# Altium PCB WEB_SERVER.PcbDoc (part 1 of 2)
Units mm, origin at the board's own origin, x right, y up, seen from the top; angles counter-clockwise.
Board outline 87.86 x 117.54 mm, 2 copper layers (Top Layer, Bottom Layer); 161 components, 198 nets, 620 pads, 277 vias.
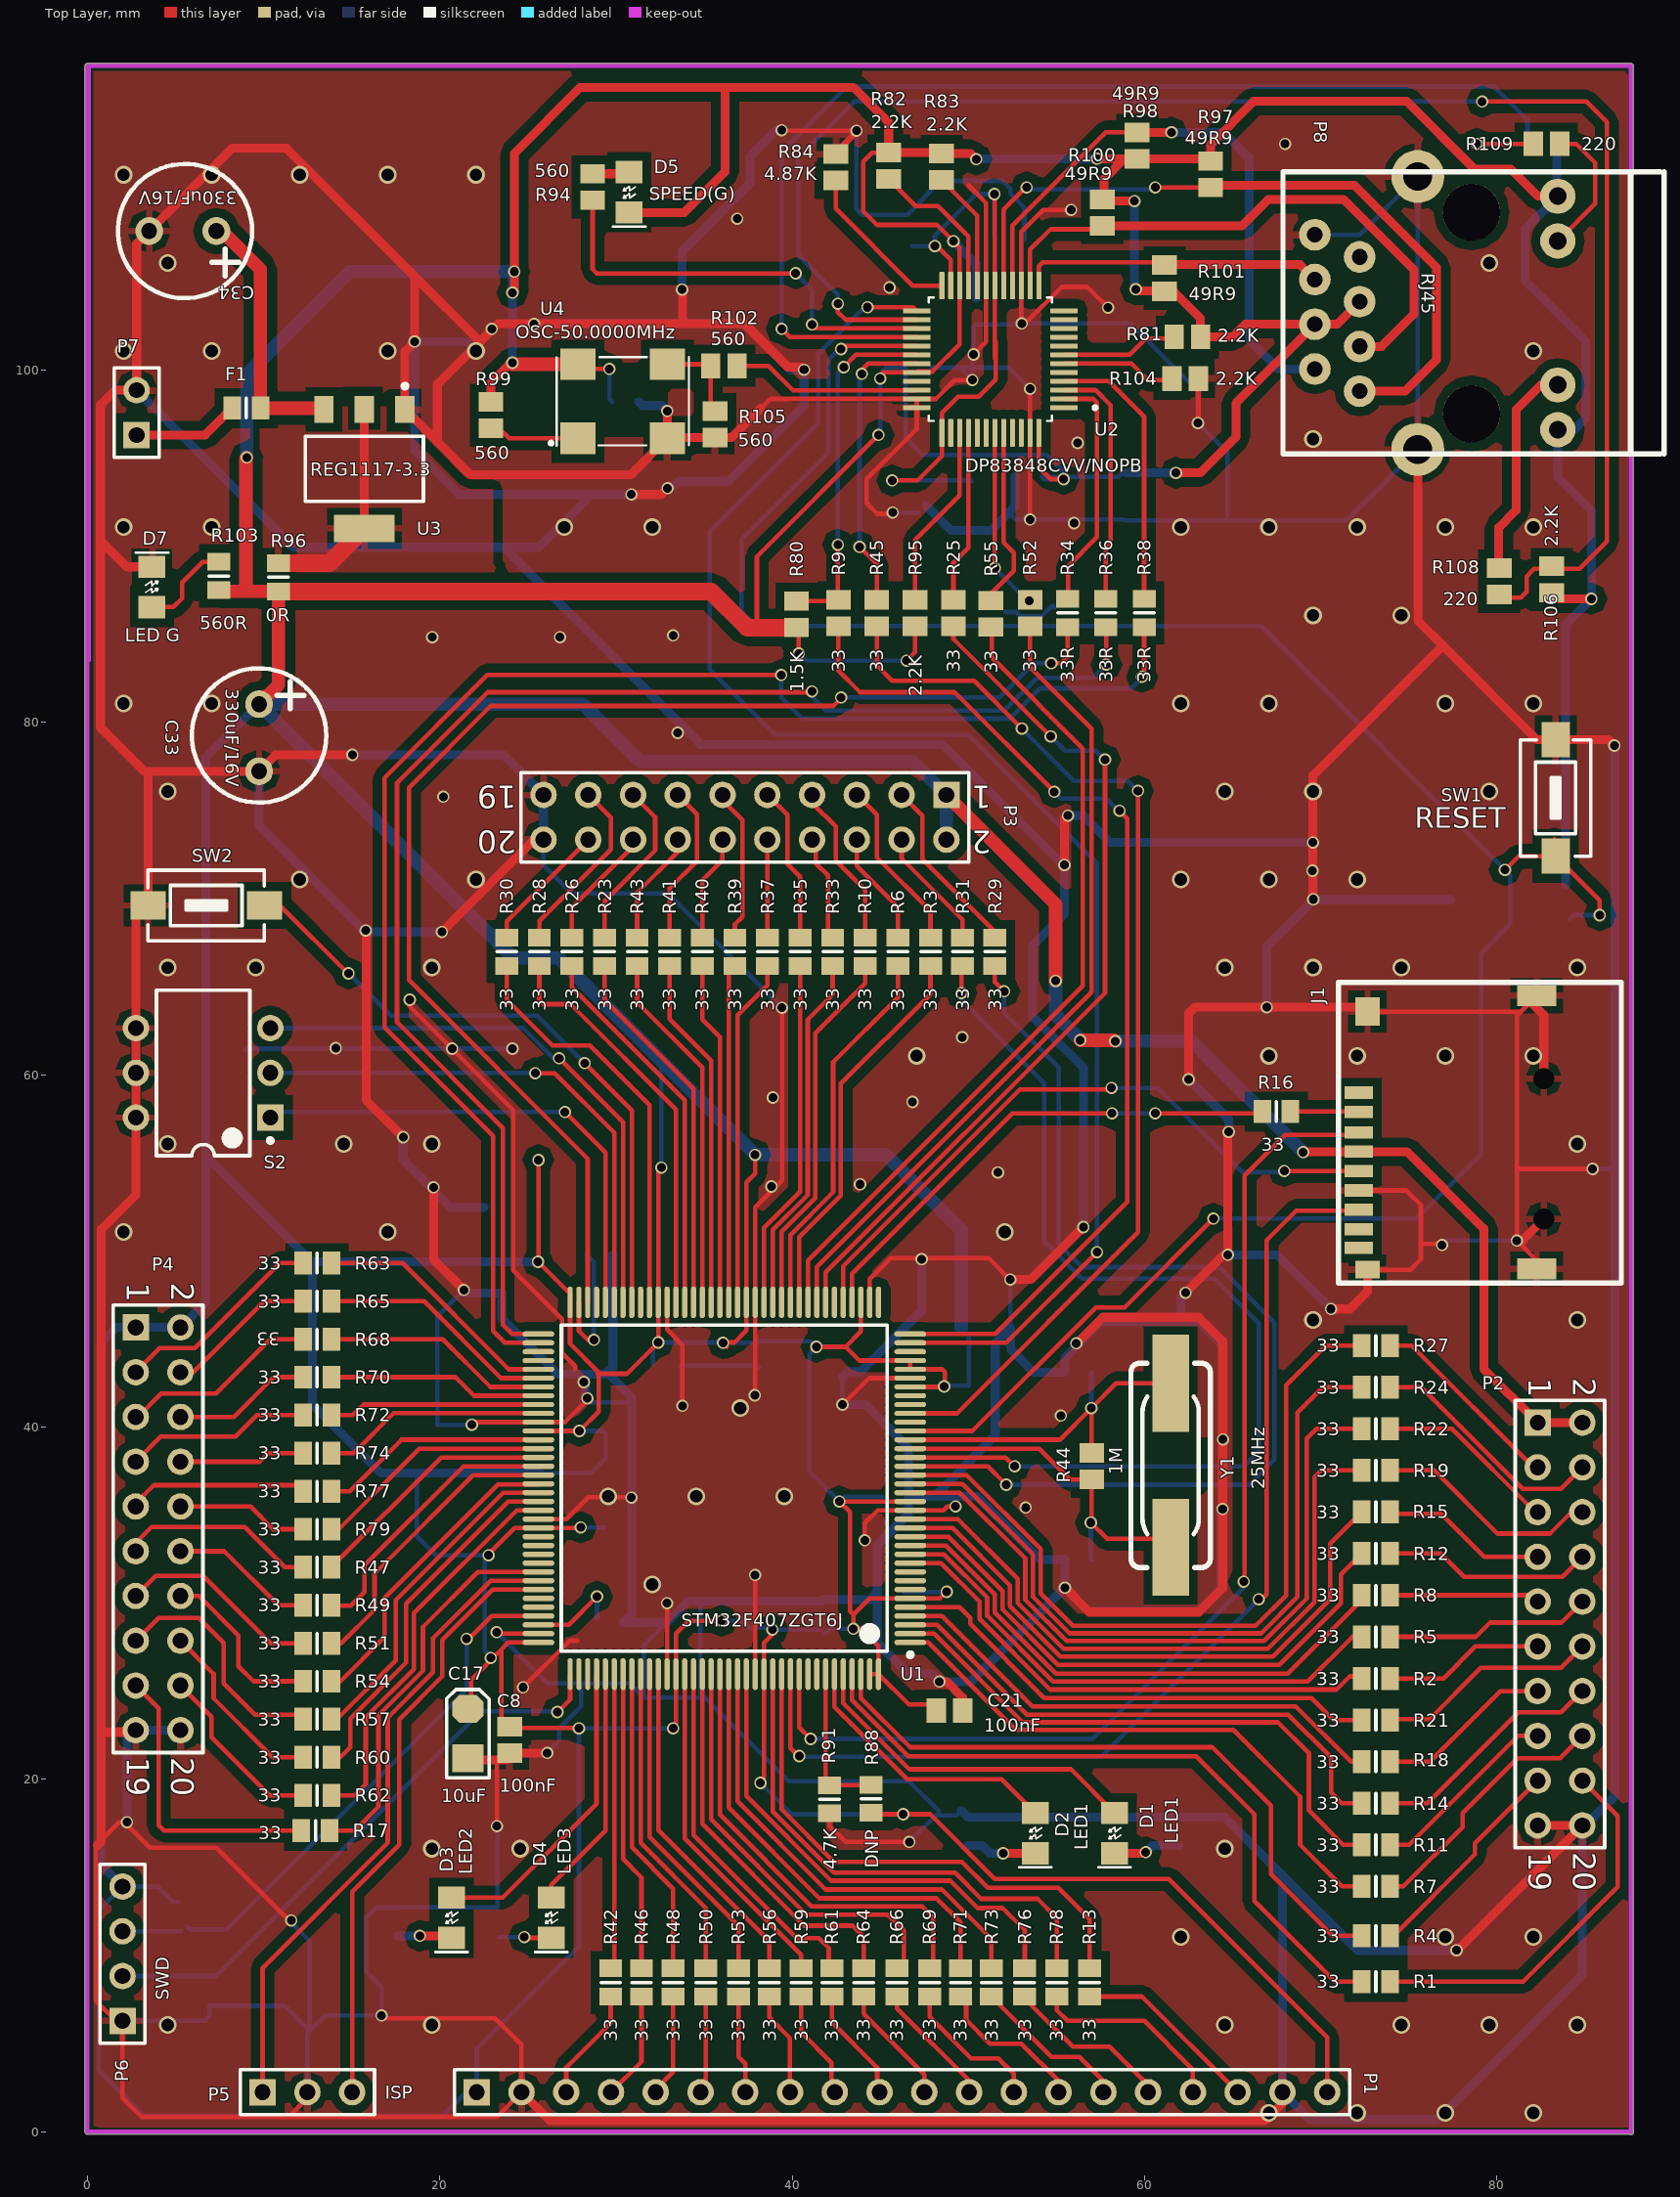
[diagram p0: Top Layer view]
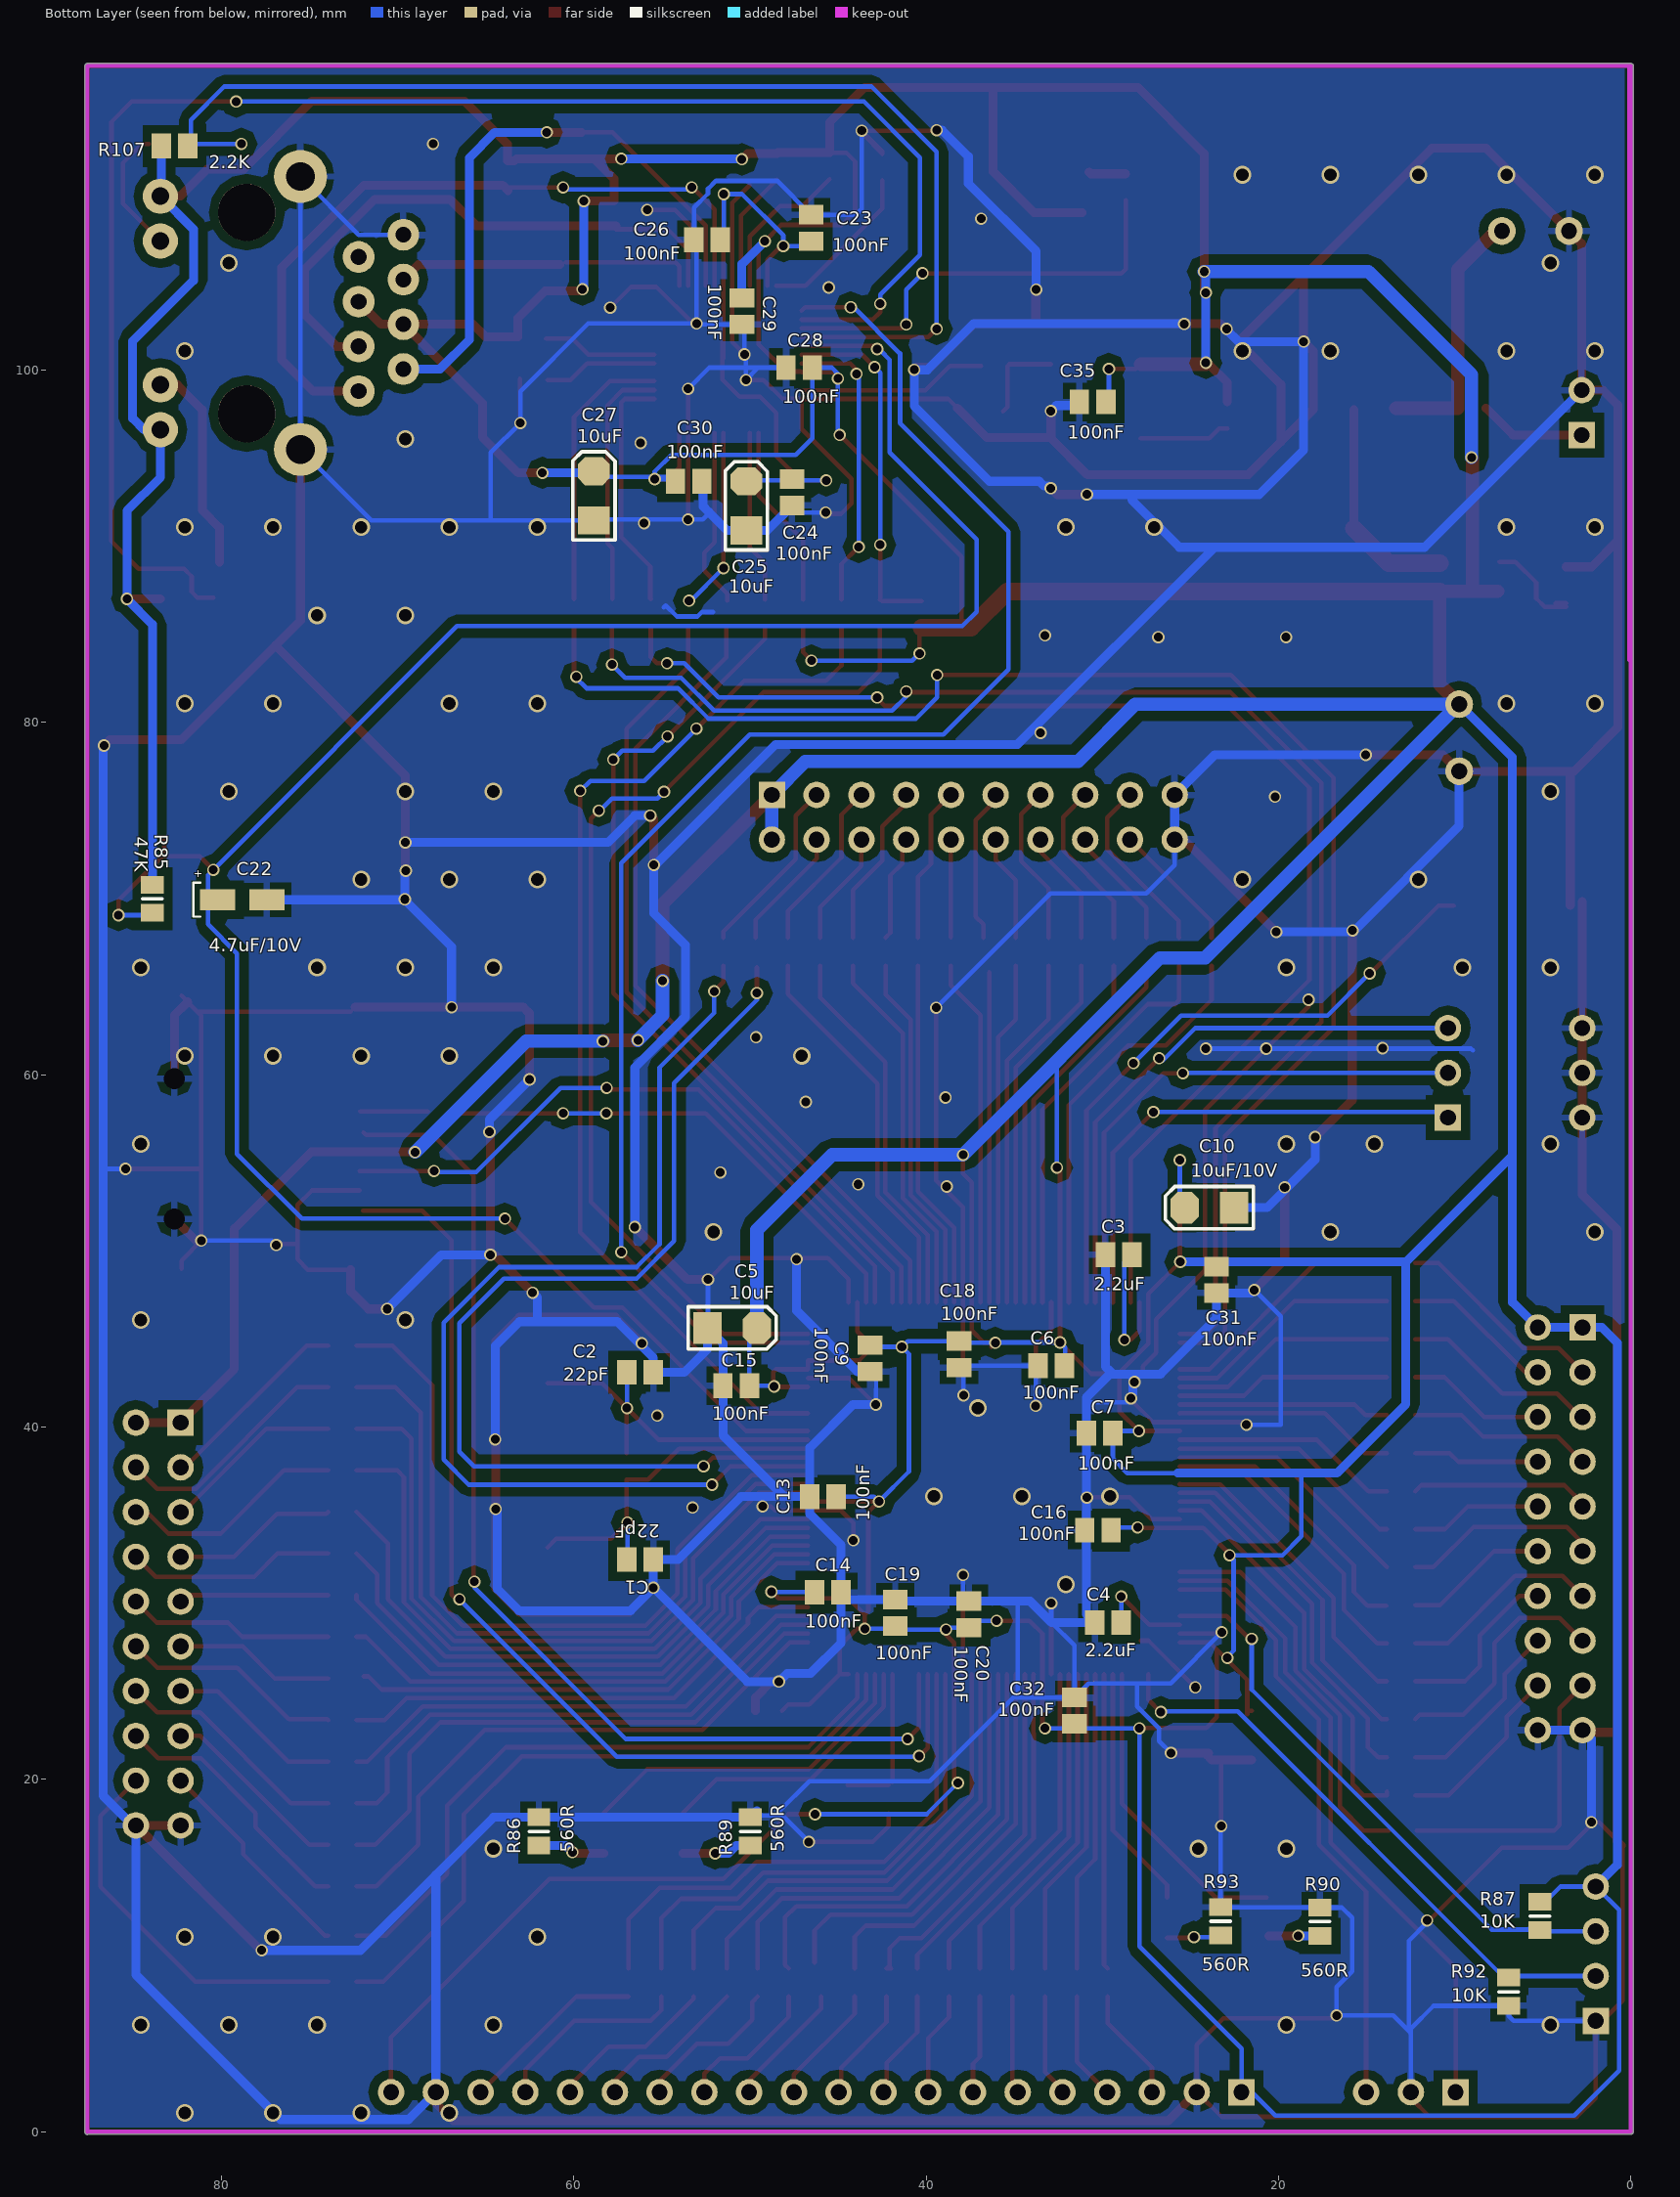
[diagram p1: Bottom Layer view, seen from below]

## Layer stack, top to bottom
Top Solder: solder mask 0.0102, Solder Resist, Dk 3.5
Top Layer: signal copper 0.0356
Dielectric1: dielectric 0.32, FR-4, Dk 4.8
Bottom Layer: signal copper 0.0356
Bottom Solder: solder mask 0.0102, Solder Resist, Dk 3.5

## Board outline
-0.128,0 ccw(c0,0) 0.016,-0.127 87.524,-0.127 ccw(c87.6,-0.025) 87.727,-0.025 87.727,117.257 ccw(c87.6,117.257) 87.6,117.384 87.541,117.384 ccw(c87.525,117.257) 87.525,117.385 0,117.385 ccw(c0,117.257) -0.128,117.257

## Design rules (kind name [scope] priority, off if disabled: settings)
Clearance Clearance_3 [InNetClass('RF HV Signal')] p1: gap=1.016 ignorepadtopadclearanceinfootprint=FALSE except(0: Arc-Hole Track-Hole SMDPad-Hole THPad-Hole Via-Hole Fill-Hole Poly-Hole Region-Hole Text-Hole)
Clearance Clearance_2 [InNetClass('220V')] p2: gap=1.016 ignorepadtopadclearanceinfootprint=FALSE except(0: Arc-Hole Track-Hole SMDPad-Hole THPad-Hole Via-Hole Fill-Hole Poly-Hole Region-Hole Text-Hole)
Clearance Clearance_1 [InPolygon vs OnLayer('Keep-Out Layer')] p3: gap=0.025 ignorepadtopadclearanceinfootprint=FALSE except(0: Arc-Hole Track-Hole SMDPad-Hole THPad-Hole Via-Hole Fill-Hole Poly-Hole Region-Hole Text-Hole)
Clearance Clearance_poly [InPolygon] p4: gap=0.508 ignorepadtopadclearanceinfootprint=FALSE except(0: Arc-Hole Track-Hole SMDPad-Hole THPad-Hole Via-Hole Fill-Hole Poly-Hole Region-Hole Text-Hole)
Clearance [All] p5: gap=0.178 ignorepadtopadclearanceinfootprint=FALSE except(0: Arc-Hole Track-Hole SMDPad-Hole THPad-Hole Via-Hole Fill-Hole Poly-Hole Region-Hole Text-Hole)
ComponentClearance [All] p1: gap=0 collisioncheckmode=3 verticalgap=0 showdistances=FALSE
DiffPairsRouting [All] p1: maxlimit=0.203 minlimit=0.203 mostfreqgap=0.203 toplayer_minwidth=0.203 toplayer_maxwidth=2.54 toplayer_prefwidth=0.762 bottomlayer_minwidth=0.203 bottomlayer_maxwidth=2.54 bottomlayer_prefwidth=0.762 maxuncoupledlength=12.7
HoleSize [All] p1: absolutevalues=TRUE maxlimit=7.62 minlimit=0.025 maxpercent=80.000 minpercent=20.000
PolygonConnect PolygonConnect_VIA [ISPoly vs IsVia] p1: thpad.connectstyle=Relief thpad.reliefconductorwidth=0.254 thpad.reliefentries=4 thpad.polygonreliefangle="90 Angle" thpad.airgapwidth=0.254 smdpad.connectstyle=Relief smdpad.reliefconductorwidth=0.254 smdpad.reliefentries=4 smdpad.polygonreliefangle="90 Angle" smdpad.airgapwidth=0.254 via.connectstyle=Direct via.reliefconductorwidth=0.254 via.reliefentries=4 via.polygonreliefangle="90 Angle" via.airgapwidth=0.254
PolygonConnect [IsPoly] p2: thpad.connectstyle=Relief thpad.reliefconductorwidth=0.381 thpad.reliefentries=4 thpad.polygonreliefangle="90 Angle" thpad.airgapwidth=0.381 smdpad.connectstyle=Relief smdpad.reliefconductorwidth=0.381 smdpad.reliefentries=4 smdpad.polygonreliefangle="90 Angle" smdpad.airgapwidth=0.381 via.connectstyle=Direct via.reliefconductorwidth=0.381 via.reliefentries=4 via.polygonreliefangle="90 Angle" via.airgapwidth=0.381
RoutingVias [All] p1: holewidth=0.5 width=0.7 viastyle="Through Hole" minholewidth=0.305 minwidth=0.508 maxholewidth=1 maxwidth=1
SolderMaskExpansion [All] p1: expansion=0.102
Width [All] p1: maxlimit=4 minlimit=0.256 preferedwidth=0.5 minimp=50.000000 maximp=50.000000 favimp=50.000000
27 further rules are at their usual default settings.

## Components (designator, comment, footprint, x,y, rotation, side; value= is the part's Value field where it differs from the comment)
C1 "22pF" C0805 56.225,32.475 r180 bottom
C2 "22pF" C0805 56.225,43.1 r0 bottom
C3 "2.2uF" C0805 29.075,49.775 r180 bottom
C4 "2.2uF" C0805 29.675,28.9 r180 bottom
C5 "10uF" CAP_Tantal_1206 51,45.625 r270 bottom value=100pF
C6 "100nF" C0805 32.9,43.475 r0 bottom
C7 "100nF" C0805 30.15,39.65 r0 bottom
C8 "100nF" C0805 23.975,22.25 r270 top
C9 "100nF" C0805 43.175,43.9 r270 bottom
C10 "10uF/10V" CAP_Tantal_1206 23.925,52.45 r90 bottom
C13 "100nF" C0805 45.85,36.05 r0 bottom
C14 "100nF" C0805 45.575,30.625 r180 bottom
C15 "100nF" C0805 50.775,42.35 r0 bottom
C16 "100nF" C0805 30.25,34.15 r0 bottom
C17 "10uF" CAP_Tantal_1206 21.6,22.6 r0 top value=100pF
C18 "100nF" C0805 38.125,44.125 r270 bottom
C19 "100nF" C0805 41.75,29.45 r90 bottom
C20 "100nF" C0805 37.569,29.365 r90 bottom
C21 "100nF" C0805 48.925,23.9 r0 top
C22 "4.7uF/10V" "Tantalium CAPP Size A 1206 (3216X18L)" 80.2,69.925 r180 bottom
C23 "100nF" c0805 46.525,108.05 r90 bottom value=100pF
C24 "100nF" C0805 47.6,93.05 r270 bottom value=100pF
C25 "10uF" CAP_Tantal_1206 50.2,92.275 r180 bottom value=100pF
C26 "100nF" c0805 52.425,107.375 r0 bottom value=100pF
C27 "10uF" CAP_Tantal_1206 58.85,92.85 r180 bottom value=100pF
C28 "100nF" C0805 47.2,100.125 r0 bottom value=100pF
C29 "100nF" c0805 50.45,103.325 r270 bottom value=100pF
C30 "100nF" C0805 53.475,93.675 r180 bottom value=100pF
C31 "100nF" c0805 23.525,48.35 r270 bottom value=100pF
C32 "100nF" c0805 31.575,23.9 r90 bottom value=100pF
C33 "330uF/16V" RB.15/.3 9.75,81.025 r90 top
C34 "330uF/16V" RB.15/.3 7.325,107.875 r0 top
C35 "100nF" c0805 30.55,98.175 r0 bottom value=100pF
D1 "LED1" LED_805 58.3,16.95 r180 top
D2 "LED1" LED_805 53.8,16.95 r180 top
D3 "LED2" LED_805 20.675,12.15 r180 top
D4 "LED3" LED_805 26.325,12.15 r180 top
D5 "SPEED(G)" LED0805 30.75,110.075 r0 top
D7 "LED G" LED_805 3.675,87.675 r0 top
F1 "1A Fuse" 6-0805_L 9.025,97.825 r0 top
J1 "7MSDP-B0-1012" "MicroSD Slot" 79.55,56.725 r90 top
P1 "Header 20" HDR1X20 22.1,2.25 r0 top
P2 "Header 10X2" HDR2X10 82.3,40.25 r270 top
P3 "Header 10X2" HDR2X10 48.75,75.875 r180 top
P4 "Header 10X2" HDR2X10 2.75,45.65 r270 top
P5 "ISP" HDR1X3 9.95,2.25 r0 top
P6 "SWD" HDR1X4 2,6.3 r90 top
P7 "Header 2" HDR1X2 2.8,96.3 r90 top
P8 "RJ45" RJ245 78.55,103.225 r270 top
R1 "33" 6-0805_L 73.125,8.525 r180 top value=1K
R2 "33" 6-0805_L 73.125,25.733 r0 top value=1K
R3 "33" 6-0805_L 47.85,66.975 r90 top value=1K
R4 "33" 6-0805_L 73.125,11.125 r180 top value=1K
R5 "33" 6-0805_L 73.125,28.094 r0 top value=1K
R6 "33" 6-0805_L 46,66.975 r90 top value=1K
R7 "33" 6-0805_L 73.125,13.925 r180 top value=1K
R8 "33" 6-0805_L 73.125,30.456 r0 top value=1K
R9 "33" c0805 42.625,86.2 r90 top value=1K
R10 "33" 6-0805_L 44.15,66.975 r90 top value=1K
R11 "33" 6-0805_L 73.125,16.287 r180 top value=1K
R12 "33" 6-0805_L 73.125,32.817 r0 top value=1K
R13 "33" 6-0805_L 56.875,8.475 r270 top value=1K
R14 "33" 6-0805_L 73.125,18.648 r180 top value=1K
R15 "33" 6-0805_L 73.125,35.179 r0 top value=1K
R16 "33" 6-0805_L 67.475,57.9 r180 top value=1K
R17 "33" 6-0805_L 12.95,17.1 r0 top value=1K
R18 "33" 6-0805_L 73.125,21.01 r180 top value=1K
R19 "33" 6-0805_L 73.125,37.54 r0 top value=1K
R21 "33" 6-0805_L 73.125,23.371 r180 top value=1K
R22 "33" 6-0805_L 73.125,39.902 r0 top value=1K
R23 "33" 6-0805_L 29.35,66.975 r270 top value=1K
R24 "33" 6-0805_L 73.125,42.263 r0 top value=1K
R25 "33" c0805 49.15,86.2 r270 top value=1K
R26 "33" 6-0805_L 27.5,66.975 r270 top value=1K
R27 "33" 6-0805_L 73.125,44.625 r0 top value=1K
R28 "33" 6-0805_L 25.65,66.975 r270 top value=1K
R29 "33" 6-0805_L 51.5,66.975 r90 top value=1K
R30 "33" 6-0805_L 23.8,66.975 r270 top value=1K
R31 "33" 6-0805_L 49.675,66.975 r90 top value=1K
R33 "33" 6-0805_L 42.3,66.975 r90 top value=1K
R34 "33R" 6-0805_L 55.625,86.2 r90 top
R35 "33" 6-0805_L 40.45,66.975 r90 top value=1K
R36 "33R" 6-0805_L 57.8,86.2 r90 top
R37 "33" 6-0805_L 38.6,66.975 r90 top value=1K
R38 "33R" 6-0805_L 59.975,86.2 r90 top
R39 "33" 6-0805_L 36.75,66.975 r90 top value=1K
R40 "33" 6-0805_L 34.9,66.975 r90 top value=1K
R41 "33" 6-0805_L 33.05,66.975 r270 top value=1K
R42 "33" 6-0805_L 29.7,8.475 r270 top value=1K
R43 "33" 6-0805_L 31.2,66.975 r270 top value=1K
R44 "1M" c0805 57,37.775 r270 top value=1K
R45 "33" c0805 44.8,86.2 r90 top value=1K
R46 "33" 6-0805_L 31.45,8.475 r270 top value=1K
R47 "33" 6-0805_L 13.05,32.043 r0 top value=1K
R48 "33" 6-0805_L 33.25,8.475 r270 top value=1K
R49 "33" 6-0805_L 13.05,29.886 r0 top value=1K
R50 "33" 6-0805_L 35.1,8.475 r270 top value=1K
R51 "33" 6-0805_L 13.05,27.729 r0 top value=1K
R52 "33" c0805 53.5,86.2 r90 top value=1K
R53 "33" 6-0805_L 36.95,8.475 r270 top value=1K
R54 "33" 6-0805_L 13.05,25.571 r0 top value=1K
R55 "33" c0805 51.275,86.15 r90 top value=1K
R56 "33" 6-0805_L 38.7,8.475 r270 top value=1K
R57 "33" 6-0805_L 13.05,23.414 r0 top value=1K
R59 "33" 6-0805_L 40.5,8.475 r270 top value=1K
R60 "33" 6-0805_L 13.05,21.257 r0 top value=1K
R61 "33" 6-0805_L 42.25,8.475 r270 top value=1K
R62 "33" 6-0805_L 13.05,19.1 r0 top value=1K
R63 "33" 6-0805_L 13.05,49.3 r180 top value=1K
R64 "33" 6-0805_L 44.05,8.475 r90 top value=1K
R65 "33" 6-0805_L 13.05,47.143 r180 top value=1K
R66 "33" 6-0805_L 45.95,8.475 r90 top value=1K
R68 "33" 6-0805_L 13.05,44.986 r180 top value=1K
R69 "33" 6-0805_L 47.8,8.475 r90 top value=1K
R70 "33" 6-0805_L 13.05,42.829 r180 top value=1K
R71 "33" 6-0805_L 49.55,8.475 r90 top value=1K
R72 "33" 6-0805_L 13.05,40.671 r180 top value=1K
R73 "33" 6-0805_L 51.3,8.475 r90 top value=1K
R74 "33" 6-0805_L 13.05,38.514 r180 top value=1K
R76 "33" 6-0805_L 53.2,8.475 r90 top value=1K
R77 "33" 6-0805_L 13.05,36.357 r180 top value=1K
R78 "33" 6-0805_L 55.025,8.475 r90 top value=1K
R79 "33" 6-0805_L 13.05,34.2 r180 top value=1K
R80 "1.5K" c0805 40.25,86.125 r270 top value=1K
R81 "2.2K" c0805 62.425,101.875 r0 top value=560
R82 "2.2K" c0805 45.475,111.575 r90 top value=560
R83 "2.2K" c0805 48.475,111.525 r90 top value=560
R84 "4.87K" c0805 42.475,111.5 r90 top value=1K
R85 "47K" 6-0805_L 83.9,69.975 r90 bottom
R86 "560R" 6-0805_L 61.975,17.05 r270 bottom
R87 "10K" 6-0805_L 5.175,12.25 r90 bottom
R88 "DNP" 6-0805_L 44.475,18.9 r270 top value=1K
R89 "560R" 6-0805_L 49.975,17.05 r90 bottom value=560
R90 "560R" 6-0805_L 17.65,11.925 r90 bottom value=560
R91 "4.7K" 6-0805_L 42.125,18.875 r90 top value=1K
R92 "10K" 6-0805_L 6.95,7.95 r270 bottom
R93 "560R" 6-0805_L 23.275,11.95 r90 bottom value=560
R94 "560" c0805 28.675,110.375 r270 top
R95 "2.2K" c0805 46.975,86.2 r270 top value=560
R96 "0R" 6-0805_L 10.85,88.225 r90 top
R97 "49R9" c0805 63.75,111.1 r90 top
R98 "49R9" c0805 59.575,112.725 r270 top
R99 "560" c0805 22.9,97.425 r90 top
R100 "49R9" c0805 57.6,108.925 r90 top
R101 "49R9" c0805 61.125,105.2 r270 top
R102 "560" c0805 36.125,100.225 r180 top
R103 "560R" 6-0805_L 7.475,88.3 r270 top
R104 "2.2K" c0805 62.3,99.5 r180 top value=560
R105 "560" c0805 35.625,96.9 r270 top
R106 "2.2K" c0805 83.1,88.1 r270 top value=1K
R107 "2.2K" c0805 82.65,112.7 r0 bottom value=1K
R108 "220" c0805 80.125,88 r270 top value=1K
R109 "220" c0805 82.8,112.825 r180 top value=1K
S2 "SW DIP-3" DIP-6 6.575,60.1 r180 top
SW1 "Tact Switch" TUCHSWITCH_SMD_2 83.325,75.7 r90 top
SW2 "SW-PB" TUCHSWITCH_SMD_2 6.75,69.6 r180 top
U1 "STM32F407ZGT6J" STM-LQFP144_N 36.15,36.525 r180 top
U2 "DP83848CVV/NOPB" QFP50P900X900X160-49N 51.25,100.6 r180 top
U3 "REG1117-3.3" ZZ311 15.725,94.375 r180 top
U4 "OSC-50.0000MHz" XTAL-5*7 30.35,98.275 r270 top
Y1 "25MHz" "XTAL - smd (2 Pad Crystal Oscilator)" 61.475,37.825 r270 top

## Footprints (in the part's own frame and the unit in brackets; to place one, negate y for a bottom-side part, rotate by r counter-clockwise, add the part's x,y. Pads: shape width x height; smd on the part's side, far side on the other; paste and mask are expansions set on the pad)
6-0805_L [mm] "Chip Resistor, Body 2.0x1.2mm, IPC High Density"
  rect 1x1.3 smd: 1(-0.8,0) 2(0.8,0)
  silkscreen extent 0,-0.55 0,0.55, body extent -1.07,-0.7 1.07,0.7, height 0.7
C0805 [mm] "Chip Capacitor, Body 2.0x1.3mm, IPC High Density"
  rect 1.1x1.4 smd: 1(-0.75,0) 2(0.75,0)
  body extent -1.1,-0.72 1.1,0.72, height 1.4
c0805 [mm] "Chip Capacitor, Body 2.0x1.3mm, IPC High Density"
  rect 1.1x1.4 smd: 1(-0.75,0) 2(0.75,0)
  body extent -1.1,-0.72 1.1,0.72, height 1.4
CAP_Tantal_1206 [mm]
  oct 1.8x1.6 smd: 1(0,1.4)
  rect 1.8x1.6 smd: 2(0,-1.4)
  Top Layer pour cut-out: 1.374,1.355 -1.366,1.355 -1.366,-1.445 1.374,-1.445
  silkscreen extent -1.2,-2.5 1.2,2.5, body extent -0.81,-1.47 0.8,1.71, height 1.6
DIP-6 [mm] "DIP; 6 Leads; Row Spacing 7.62 mm; Pitch 2.54 mm"
  rect 1.5x1.5 hole 0.9: 1(-3.81,2.54)
  round 1.5 hole 0.9: 2(-3.81,0) 3(-3.81,-2.54) 4(3.81,-2.54) 5(3.81,0) 6(3.81,2.54)
  silkscreen extent -3.94,-4.7 2.65,4.7, body extent -3.55,-4.7 3.55,4.7, height 5.46
HDR1X2 [mm] "Connector; Header; 2 Position"
  rect 1.5x1.5 hole 0.9: 1(0,0)
  round 1.5 hole 0.9: 2(2.54,0)
  silkscreen extent -1.27,-1.27 3.81,1.27
HDR1X3 [mm] "Connector; Header; 3 Position"
  rect 1.5x1.5 hole 0.9: 1(0,0)
  round 1.5 hole 0.9: 2(2.54,0) 3(5.08,0)
  silkscreen extent -1.27,-1.27 6.35,1.27
HDR1X4 [mm] "Connector; Header; 4 Position"
  rect 1.5x1.5 hole 0.9: 1(0,0)
  round 1.5 hole 0.9: 2(2.54,0) 3(5.08,0) 4(7.62,0)
  silkscreen extent -1.27,-1.27 8.89,1.27
HDR1X20 [mm] "Connector; Header; 20 Position"
  rect 1.5x1.5 hole 0.9: 1(0,0)
  round 1.5 hole 0.9: 2(2.54,0) 3(5.08,0) 4(7.62,0) 5(10.16,0) 6(12.7,0) 7(15.24,0) 8(17.78,0) 9(20.32,0) 10(22.86,0) 11(25.4,0) 12(27.94,0) 13(30.48,0) 14(33.02,0) 15(35.56,0) 16(38.1,0) 17(40.64,0) 18(43.18,0) 19(45.72,0) 20(48.26,0)
  silkscreen extent -1.27,-1.27 49.53,1.27
HDR2X10 [mm] "Connector; Header; 10x2 Position"
  rect 1.5x1.5 hole 0.9: 1(0,0)
  round 1.5 hole 0.9: 2(0,2.54) 3(2.54,0) 4(2.54,2.54) 5(5.08,0) 6(5.08,2.54) 7(7.62,0) 8(7.62,2.54) 9(10.16,0) 10(10.16,2.54) 11(12.7,0) 12(12.7,2.54) 13(15.24,0) 14(15.24,2.54) 15(17.78,0) 16(17.78,2.54) 17(20.32,0) 18(20.32,2.54) 19(22.86,0) 20(22.86,2.54)
  silkscreen extent -1.27,-1.27 24.13,3.81
LED0805 [mil]
  rect 60x50 smd: 1(0,-45) 2(0,45)
  silkscreen extent -36,-76 36,13
LED_805 [mil]
  rect 60x50 smd: 1(0,-45) 2(0,45)
  silkscreen extent -36,-13 36,76
"MicroSD Slot" [mm]
  rect 0.7x1.6 smd mask+0.025: 1(2.25,7.4) 2(1.15,7.4) 3(0,7.4) 4(-1.1,7.4) 5(-2.2,7.4) 6(-3.3,7.4) 7(-4.4,7.4) 8(-5.5,7.4) 9(-6.55,7.4)
  rect 1x1.4 smd mask+0.025: 10(-7.8,6.9)
  round 0 hole 1.2: 10(-4.93,-3.1) 10(3.05,-3.1)
  rect 1.2x2.2 smd: 11(-7.75,-2.7) 12(7.75,-2.7)
  rect 1.6x1.4 smd: 13(6.85,6.9)
  silkscreen extent -8.55,-7.5 8.5,8.55
QFP50P900X900X160-49N [mm]
  rrect25% 1.56x0.28 smd: 1(-4.18,2.75) 2(-4.18,2.25) 3(-4.18,1.75) 4(-4.18,1.25) 5(-4.18,0.75) 6(-4.18,0.25) 7(-4.18,-0.25) 8(-4.18,-0.75) 9(-4.18,-1.25) 10(-4.18,-1.75) 11(-4.18,-2.25) 12(-4.18,-2.75) 25(4.18,-2.75) 26(4.18,-2.25) 27(4.18,-1.75) 28(4.18,-1.25) 29(4.18,-0.75) 30(4.18,-0.25) 31(4.18,0.25) 32(4.18,0.75) 33(4.18,1.25) 34(4.18,1.75) 35(4.18,2.25) 36(4.18,2.75)
  rrect25% 0.28x1.56 smd: 13(-2.75,-4.18) 14(-2.25,-4.18) 15(-1.75,-4.18) 16(-1.25,-4.18) 17(-0.75,-4.18) 18(-0.25,-4.18) 19(0.25,-4.18) 20(0.75,-4.18) 21(1.25,-4.18) 22(1.75,-4.18) 23(2.25,-4.18) 24(2.75,-4.18) 37(2.75,4.18) 38(2.25,4.18) 39(1.75,4.18) 40(1.25,4.18) 41(0.75,4.18) 42(0.25,4.18) 43(-0.25,4.18) 44(-0.75,4.18) 45(-1.25,4.18) 46(-1.75,4.18) 47(-2.25,4.18) 48(-2.75,4.18)
  silkscreen extent -6.04,-3.5 3.5,3.5
RB.15/.3 [mil]
  round 62 hole 35.43: 1(0,0) 2(-150,0)
  silkscreen extent -220,-150 80,150
RJ245 [mm] "RJ000002"
  round 1.8 hole 0.9: 1(4.44,-6.35) 2(3.18,-8.89) 3(1.9,-6.35) 4(0.64,-8.89) 5(-0.64,-6.35) 6(-1.9,-8.89) 7(-3.18,-6.35) 8(-4.44,-8.89)
  round 2 hole 1: 9(6.625,4.9) 10(4.085,4.9) 11(-4.085,4.9) 12(-6.625,4.9)
  round 3 hole 1.63: 13(7.745,-3.05) 14(-7.745,-3.05)
  round 3.25 hole 3.25: ""(-5.715,0) ""(5.715,0)
  silkscreen extent -8,-10.7 8,10.92
STM-LQFP144_N [mm] "Thin QFP, 144-Leads, Body 20x20mm, Pitch 0.5mm, IPC Medium Density"
  oval 1.8x0.3 smd: 1(-10.55,8.75) 2(-10.55,8.25) 3(-10.55,7.75) 4(-10.55,7.25) 5(-10.55,6.75) 6(-10.55,6.25) 7(-10.55,5.75) 8(-10.55,5.25) 9(-10.55,4.75) 10(-10.55,4.25) 11(-10.55,3.75) 12(-10.55,3.25) 13(-10.55,2.75) 14(-10.55,2.25) 15(-10.55,1.75) 16(-10.55,1.25) 17(-10.55,0.75) 18(-10.55,0.25) 19(-10.55,-0.25) 20(-10.55,-0.75) 21(-10.55,-1.25) 22(-10.55,-1.75) 23(-10.55,-2.25) 24(-10.55,-2.75) 25(-10.55,-3.25) 26(-10.55,-3.75) 27(-10.55,-4.25) 28(-10.55,-4.75) 29(-10.55,-5.25) 30(-10.55,-5.75) 31(-10.55,-6.25) 32(-10.55,-6.75) 33(-10.55,-7.25) 34(-10.55,-7.75) 35(-10.55,-8.25) 36(-10.55,-8.75) 73(10.55,-8.75) 74(10.55,-8.25) 75(10.55,-7.75) 76(10.55,-7.25) 77(10.55,-6.75) 78(10.55,-6.25) 79(10.55,-5.75) 80(10.55,-5.25) 81(10.55,-4.75) 82(10.55,-4.25) 83(10.55,-3.75) 84(10.55,-3.25) 85(10.55,-2.75) 86(10.55,-2.25) 87(10.55,-1.75) 88(10.55,-1.25) 89(10.55,-0.75) 90(10.55,-0.25) 91(10.55,0.25) 92(10.55,0.75) 93(10.55,1.25) 94(10.55,1.75) 95(10.55,2.25) 96(10.55,2.75) 97(10.55,3.25) 98(10.55,3.75) 99(10.55,4.25) 100(10.55,4.75) 101(10.55,5.25) 102(10.55,5.75) 103(10.55,6.25) 104(10.55,6.75) 105(10.55,7.25) 106(10.55,7.75) 107(10.55,8.25) 108(10.55,8.75)
  oval 0.3x1.8 smd: 37(-8.75,-10.55) 38(-8.25,-10.55) 39(-7.75,-10.55) 40(-7.25,-10.55) 41(-6.75,-10.55) 42(-6.25,-10.55) 43(-5.75,-10.55) 44(-5.25,-10.55) 45(-4.75,-10.55) 46(-4.25,-10.55) 47(-3.75,-10.55) 48(-3.25,-10.55) 49(-2.75,-10.55) 50(-2.25,-10.55) 51(-1.75,-10.55) 52(-1.25,-10.55) 53(-0.75,-10.55) 54(-0.25,-10.55) 55(0.25,-10.55) 56(0.75,-10.55) 57(1.25,-10.55) 58(1.75,-10.55) 59(2.25,-10.55) 60(2.75,-10.55) 61(3.25,-10.55) 62(3.75,-10.55) 63(4.25,-10.55) 64(4.75,-10.55) 65(5.25,-10.55) 66(5.75,-10.55) 67(6.25,-10.55) 68(6.75,-10.55) 69(7.25,-10.55) 70(7.75,-10.55) 71(8.25,-10.55) 72(8.75,-10.55) 109(8.75,10.55) 110(8.25,10.55) 111(7.75,10.55) 112(7.25,10.55) 113(6.75,10.55) 114(6.25,10.55) 115(5.75,10.55) 116(5.25,10.55) 117(4.75,10.55) 118(4.25,10.55) 119(3.75,10.55) 120(3.25,10.55) 121(2.75,10.55) 122(2.25,10.55) 123(1.75,10.55) 124(1.25,10.55) 125(0.75,10.55) 126(0.25,10.55) 127(-0.25,10.55) 128(-0.75,10.55) 129(-1.25,10.55) 130(-1.75,10.55) 131(-2.25,10.55) 132(-2.75,10.55) 133(-3.25,10.55) 134(-3.75,10.55) 135(-4.25,10.55) 136(-4.75,10.55) 137(-5.25,10.55) 138(-5.75,10.55) 139(-6.25,10.55) 140(-6.75,10.55) 141(-7.25,10.55) 142(-7.75,10.55) 143(-8.25,10.55) 144(-8.75,10.55)
  silkscreen extent -10.68,-9.25 9.25,9.57, body extent -10,-10 10,10, height 1.6
"Tantalium CAPP Size A 1206 (3216X18L)" [mm]
  rect 1.999x1.199 smd: 1(0,0) 2(2.8,0)
  silkscreen extent -1.38,-0.97 -0.99,0.97, body extent -0.43,-0.9 3.21,0.9, height 1.8
TUCHSWITCH_SMD_2 [mm]
  rect 2x1.6 smd mask+0.15: 1(-3.3,0) 2(3.3,0)
  silkscreen extent -3.3,-2 3.3,2, body extent -3.05,-1.91 3.05,1.91, height 2.67
"XTAL - smd (2 Pad Crystal Oscilator)" [mm] "10mm * 4mm _ 200mil / ziatbt@gmail.com"
  rect 5.5x2.08 smd: 1(-4.655,0) 2(4.655,0)
  silkscreen extent -5.8,-2.25 5.8,2.25
XTAL-5*7 [mm]
  rect 1.8x2 smd: 1(2.158,-2.515) 2(2.158,2.565) 3(-2.042,2.565) 4(-2.042,-2.515)
  silkscreen extent -2.45,-4.1 2.57,3.79
ZZ311 [mm] "SOT-223/SC-73; 4 Leads; Body 6.7 x 7.3 mm, inc. leads (LxW max)"
  rect 1.1x1.55 smd: 1(-2.3,-3.375) 2(0,-3.375) 3(2.3,-3.375)
  rect 3.45x1.55 smd: 4(0,3.375)
  silkscreen extent -3.35,-4.82 3.35,1.85

## Part data
C1 C2 C3 C4: library part Cap-Bipolar, "Bipolar Capacitor", voltage=100V, Adding Date=1387/12/20, Designer="Saeid Jorablo", Organazation=ControTec
C5 C17 C25 C27: library part Cap2, "Capacitor Tantal", PackageDescription="Capacitor; 2 Leads", PackageReference=CAPR5-4X5, Published=23-Sep-2002, Publisher="Altium Limited"
C6 C7 C8 C9 C13 C14 C15 C16 C18 C19 C20 C21: library part Cap-Bipolar, "ceramic Capacitor", voltage=100V, Adding Date=1387/12/20, Designer="Saeid Jorablo", Organazation=ControTec
C10 C22: library part Cap-Polar, "Polar Capacitor", voltage="10V 3216", Adding Date=1387/12/20, Designer="Saeid Jorablo", Organazation=ControTec
C23 C24 C26 C28 C29 C30 C31 C32 C35: library part Cap, "Capacitor", LatestRevisionDate=17-Jul-2002, LatestRevisionNote="Re-released for DXP Platform.", PackageDescription="Radial Cap, Thru-Hole; 2 Leads; 0.3 in Pin Spacing", PackageReference=RAD-0.3, Published=8-Jun-2000, Publisher="Altium Limited"
C33 C34: library part "Cap Pol1", "Polarized Capacitor (Radial)", LatestRevisionDate=17-Jul-2002, LatestRevisionNote="Re-released for DXP Platform.", PackageReference=RB7.6-15, Published=8-Jun-2000, Publisher="Altium Limited"
D1 D2 D3 D7: library part LED3, "Typical BLUE SiC LED", PackageDocument=16-Apr-2002, DatasheetDocument=16-Apr-2002, LatestRevisionDate=17-Dec-2003, LatestRevisionNote="PCB Footprint replaced.", PackageReference=3.5X2.8X1.9, Published=8-Jun-2000, Publisher="Altium Limited"
D4: "Typical BLUE SiC LED", PackageDocument=16-Apr-2002, DatasheetDocument=16-Apr-2002, LatestRevisionDate=17-Dec-2003, LatestRevisionNote="PCB Footprint replaced.", PackageReference=3.5X2.8X1.9, Published=8-Jun-2000, Publisher="Altium Limited"
D5: library part LED3, "Typical BLUE SiC LED", DatasheetVersion=16-Apr-2002, LatestRevisionDate=17-Dec-2003, LatestRevisionNote="PCB Footprint replaced.", PackageDescription="SM LED; 2 C-Bend Leads; Body 3.5 x 2.8 x 1.9 mm, inc leads (LxWxH typ)", PackageReference=3.5X2.8X1.9, PackageVersion=16-Apr-2002, Published=8-Jun-2000, Publisher="Altium Limited"
F1: library part "Fuse 2", "Fuse", LatestRevisionDate=17-Jul-2002, LatestRevisionNote="Re-released for DXP Platform.", PackageReference=PIN-W2/E2.8, Published=8-Jun-2000, Publisher="Altium Limited"
J1: "MicroSD Slot"
P1: "Header, 20-Pin", LatestRevisionDate=17-Jul-2002, LatestRevisionNote="Re-released for DXP Platform.", Publisher="Altium Limited"
P2 P3 P4: "Header, 10-Pin, Dual row", LatestRevisionDate=17-Jul-2002, LatestRevisionNote="Re-released for DXP Platform.", Publisher="Altium Limited"
P5: library part "Header 3", "Header, 3-Pin", LatestRevisionDate=17-Jul-2002, LatestRevisionNote="Re-released for DXP Platform.", Publisher="Altium Limited"
P6: library part "Header 4", "Header, 4-Pin", LatestRevisionDate=17-Jul-2002, LatestRevisionNote="Re-released for DXP Platform.", Publisher="Altium Limited"
P7: "Header, 2-Pin", LatestRevisionDate=17-Jul-2002, LatestRevisionNote="Re-released for DXP Platform.", Publisher="Altium Limited"
P8: library part RJ245
R1 R2 R3 R4 R5 R6 R7 R8 R10 R11 R12 R13 R14 R15 R16 R17 R18 R19 R21 R22 R23 R24 R26 R27 R28 R29 R30 R31 R33 R34 R35 R36 R37 R38 R39 R40 R41 R42 R43 R46 R47 R48 R49 R50 R51 R53 R54 R56 R57 R59 R60 R61 R62 R63 R64 R65 R66 R68 R69 R70 R71 R72 R73 R74 R76 R77 R78 R79 R81 R82 R83 R85 R86 R87 R88 R89 R90 R91 R92 R93 R94 R95 R96 R99 R102 R103 R104 R105: library part "Res Semi", "Semiconductor Resistor", LatestRevisionDate=17-Jul-2002, LatestRevisionNote="Re-released for DXP Platform.", PackageReference=AXIAL-0.5, Published=8-Jun-2000, Publisher="Altium Limited"
  R1 R2 R3 R4 R5 R6 R7 R8 R10 R11 R12 R13 R14 R15 R16 R17 R18 R19 R21 R22 R23 R24 R26 R27 R28 R29 R30 R31 R33 R35 R37 R39 R40 R41 R42 R43 R46 R47 R48 R49 R50 R51 R53 R54 R56 R57 R59 R60 R61 R62 R63 R64 R65 R66 R68 R69 R70 R71 R72 R73 R74 R76 R77 R78 R79 R81 R82 R83 R88 R91 R94 R95 R99 R102 R104 R105: PackageDescription="Axial Device, Thru-Hole; 2 Leads; 0.5 in Pin Spacing"
R9 R25 R44 R45 R52 R55 R80 R106 R107 R108 R109: library part Res1, "Resistor", LatestRevisionDate=17-Jul-2002, LatestRevisionNote="Re-released for DXP Platform.", PackageDescription="Axial Device, Thru-Hole; 2 Leads; 0.3 in Pin Spacing", PackageReference=AXIAL-0.3, Published=8-Jun-2000, Publisher="Altium Limited"
R84: library part Res1, "Resistor 1%", LatestRevisionDate=17-Jul-2002, LatestRevisionNote="Re-released for DXP Platform.", PackageDescription="Axial Device, Thru-Hole; 2 Leads; 0.3 in Pin Spacing", PackageReference=AXIAL-0.3, Published=8-Jun-2000, Publisher="Altium Limited"
R97 R98 R100 R101: library part Resistor, "Resistor", Power="1/8 W", Tolerance=1%
S2: "DIP Switch, 3 Position, SPST", Code_JEDEC=MO-001-AM, LatestRevisionDate=17-Jul-2002, LatestRevisionNote="Re-released for DXP Platform.", PackageReference=DIP-6, Published=24-Mar-1999, Publisher="Altium Limited"
SW1: library part "Tak Switch", "Swich", Designed=19-October-2009, Designer=ziatbt@gmail.com
SW2: "Switch", LatestRevisionDate=17-Jul-2002, LatestRevisionNote="Re-released for DXP Platform.", PackageDescription="Switch; 2 Leads", PackageReference=SPST-2, Published=24-Mar-1999, Publisher="Altium Limited"
U1: "ARM Cortex-M4 32-bit MCU+FPU, 210 DMIPS, 1024 kB Flash, 192 kB Internal RAM, 114 I/Os, 144-pin LQFP, -40 to 85 degC, Tray", I/Os (High Current)=114, Manufacturer=STMicroelectronics, Operating Frequency(F) (Processor speed) (MHz)=168, Supplier Part Number 1=STM32F407ZGT6J-ND, Supply Voltage(Vcc) max (V)=3.6, Supply Voltage(Vcc) min (V)=1.8, ComponentLink1Description="Manufacturer URL", ComponentLink1URL=http://www.st.com/web/en/home.html, ComponentLink2Description=Datasheet, ComponentLink2URL=http://www.st.com/st-web-ui/static/active/en/resource/technical/document/datasheet/DM00037051.pdf, ComponentLink3Description="Package Specification", ComponentLink3URL=http://www.st.com/st-web-ui/static/active/en/resource/technical/document/datasheet/DM00037051.pdf, Core="ARM Cortex-M4", D/A Converter=2x12-bit, DatasheetVersion="Rev. 4", FLASH Size (Prog) (kB)=1024, Internal RAM Size (kB)=192, Mounting Technology="Surface Mount", PackageDescription="144-Pin Low Profile Quad Flat Package, 20 x 20 mm Body, 0.5 mm Pitch", PackageReference=LQFP144, PackageVersion="Rev. 4, 06/2013", Packing=Tray, PartNumber=STM32F407ZGT6J, Supplier 1=Digi-Key, Supplier 2=Farnell, Supplier 3=Newark, Supplier 4=Newark, Supplier 5=Mouser, Supplier Part Number 2=2333299, Supplier Part Number 3=99W9915, Supplier Part Number 4=66W7308, Supplier Part Number 5=511-STM32F407ZGT6J
U2: Package=None, Availability=Unavailable, MP=DP83848CVV/NOPB, Price=None
U3: "800mA and 1A Low Dropout Positive Regulator 2.85V, 3.3V, 5V, and Adjustable", ComponentLink1Description="Manufacturer Link", ComponentLink1URL=http://www.ti.com/, ComponentLink2Description=Datasheet, ComponentLink2URL=http://www-s.ti.com/sc/ds/REG1117.pdf, DatasheetVersion=Sep-1997, LatestRevisionDate=17-Jul-2002, LatestRevisionNote="Re-released for DXP Platform.", PackageDescription="SOT-223/SC-73; 4 Leads; Body 6.7 x 7.3 mm, inc. leads (LxW max)", PackageReference=ZZ311, PackageVersion=revC, Published=8-Jun-2000, Publisher="Altium Limited"
U4: library part XTALL-24.0000
Y1: library part XTAL, "Crystal Oscillator", LatestRevisionDate=17-Jul-2002, LatestRevisionNote="Re-released for DXP Platform.", PackageDescription="Crystal, Thru-Hole; 2 Leads; Body 3.1 x 8.2 mm (Dia.xH)", PackageReference=R38, Published=8-Jun-2000, Publisher="Altium Limited"

## Via types
v1: diameter 0.7, hole 0.5, Top Layer to Bottom Layer, 196 vias
v2: diameter 1, hole 0.711, Top Layer to Bottom Layer, 81 vias

## Nets (pads, with @x,y where several pads share a name; then routed paths per layer and width w, separated by ;. In a path a pad name is that pad's centre, name@x,y a point inside that pad or via, vN(x,y) a via of type N, cw(c..) or ccw(c..) an arc to the next point about the centre after c; other vN are vias at no path point)
4.5-6V: F1.1 P7.1 | length 6.1
  Top Layer w0.5: P7.1@2.8,96.3 6.7,96.3 F1.1@8.225,97.825
50MHz_ETH: R102.1 U2.34 | length 10.7
  Top Layer w0.256: R102.1@36.875,100.225 38.65,100.225 40.051,98.824 U2.34@46.969,98.824
ETH_CRS_DV: R25.1 U2.40 | length 9.8
  Top Layer w0.256: R25.1@49.15,86.95 49.15,89.05 50,89.9 U2.40@50,96.42
ETH_MDC: R45.2 U2.31 | length 16.6
  Top Layer w0.256: v1(43.825,89.95) 44.8,88.975 R45.2@44.8,86.95 ; v1(43.95,99.775) 43.95,100 44.3,100.35 U2.31@47.07,100.35
  Bottom Layer w0.256: v1(43.825,89.95) v1@43.825,99.625
ETH_MDIO: R9.2 R80.1 U2.30 | length 20
  Top Layer w0.256: R80.1@40.25,86.875 R9.2@42.5,86.875 ; v1(42.6,90.075) 42.6,86.975 R9.2@42.625,86.95 ; v1(42.925,100.15) 43.625,100.85 U2.30@47.07,100.85
  Bottom Layer w0.256: v1(42.6,90.075) 42.6,99.825 v1(42.925,100.15)
ETH_REF_CLK: U1.35 U2.25 | length 88.6
  Top Layer w0.256: v1(44.275,103.55) 46.87,103.55 U2.25@47.07,103.35 ; U1.35@46.7,44.775 52.15,44.775 v1(57.3,49.925)
  Bottom Layer w0.256: v1(44.275,103.55) 44.1,103.55 41.475,100.925 41.475,96.975 35.325,90.825 35.325,83 39.025,79.3 50,79.3 57.3,72 v1(57.3,49.925)
ETH_RXD0: R52.2 U2.43 | length 10.5
  Top Layer w0.256: v1(51.5,88.75) U2.43@51.5,96.42
  Bottom Layer w0.256: v1(51.5,88.75) 53.45,86.8 v1(53.45,86.9)
ETH_RXD1: R55.2 U2.44 | length 10.3
  Top Layer w0.256: R55.2@51.275,86.9 51.275,87.3 52.575,88.6 52.575,89.625 52,90.2 U2.44@52,96.42
ETH_TXD0: R36.2 U2.3 | length 14.1
  Top Layer w0.256: U2.3@55.43,98.85 57.213,98.85 58.075,97.988 58.075,90.15 57.8,89.875 R36.2@57.8,87
ETH_TXD1: R38.2 U2.4 | length 15.7
  Top Layer w0.256: U2.4@55.43,99.35 57.95,99.35 59.975,97.325 R38.2@59.975,87
ETH_TXDEN: R34.2 U2.2 | length 13.8
  Top Layer w0.256: U2.2@55.43,98.35 57.1,98.35 57.3,98.15 57.3,90.5 55.65,88.85 55.65,87.025 R34.2@55.625,87
GLED-: P8.10 R108.1 | length 12
  Top Layer w0.5: R108.1@80.1,89.075 80.1,91.05 81.075,92.025 81.075,97.725 82.49,99.14 P8.10@83.45,99.14
GND: C1.2 C2.1 C3.1 C4.1 C5.2 C6.2 C7.2 C8.2 C9.2 C10.2 C13.2 C14.2 C15.2 C16.2 C17.2 C18.2 C19.2 C20.2 C21.2 C22.2 C23.2 C24.2 C25.2 C26.2 C27.2 C28.2 C29.2 C30.2 C31.2 C32.2 C33.2 C34.2 C35.2 D7.2 J1.6 J1.10 J1.11 J1.12 J1.13 P1.2 P1.19 P2.19 P2.20 P3.19 P3.20 P4.19 P4.20 P5.2 P6.1 P7.2 P8.8 P8.13 P8.14 R84.2 R86.1 R89.2 R90.2 R91.1 R92.2 R93.2 R104.1 R105.2 S2.4 S2.5 S2.6 SW1.2 SW2.2 U1.16 U1.31 U1.38 U1.51 U1.61 U1.83 U1.94 U1.107 U1.120 U1.130 U2.15 U2.19 U2.35 U2.36 U2.47 U3.1 U4.2 | length 1501.7
  Top Layer w0.256: v1@2.25,17.425 3.55,16.125 7.325,16.125 11.45,12 v1(11.575,12) ; v1(2.25,17.575) 1.8,17.575 0.8,16.575 0.475,16.25 0.475,7.45 1.625,6.3 P6.1@2,6.3 2,1.925 3.075,0.85 11.425,0.85 ; P5.2@12.49,2.25 12.49,1.915 11.425,0.85 ; v1(16.7,6.6) 16.85,6.45 23.13,6.45 24.64,4.94 P1.2@24.64,2.25 23.24,0.85 11.425,0.85 ; v1(18.3,64.25) 18.3,63.875 v1(20.7,61.475) 24.175,58 24.175,48.9 26.95,46.125 26.95,44.201 27.7,43.451 27.7,43.3 ; v1(21.825,40.125) 21.9,40.125 22.05,40.275 U1.83@25.6,40.275 27.1,40.275 28.375,41.55 v1(28.375,41.625) ; v1(23.225,28.35) 23.3,28.275 U1.107@25.6,28.275 ; v1(23.25,17.35) 23.25,21 ; v1(24.725,25.225) 27.375,27.875 27.8,27.875 ; U1.94@25.6,34.775 27.2,34.775 28.45,36.025 30.85,36.025 v1(30.875,36) ; U1.120@32.9,25.975 v1(32.9,30) ; U1.61@32.9,47.075 32.9,45.525 33.775,44.65 v1(33.775,41.2) ; v1(37.875,41.8) 37.9,41.825 U1.51@37.9,47.075 37.9,52.475 39.425,54 v1(39.425,63.8) ; U1.130@37.9,25.975 v1(37.9,31.6) ; 38.225,97.825 38.75,98.35 U2.35@47.07,98.35 ; v1@39.55,113.575 v1(43.65,113.575) 42.475,112.4 R84.2@42.475,112.25 v1@43.525,113.3 ; R91.1@42.125,18.075 42.125,17.35 43.025,16.45 v1(46.65,16.45) ; v1(42.85,41.275) 42.875,41.275 44.375,42.775 U1.31@46.7,42.775 ; v1(44.125,33.575) 44.125,34.55 44.85,35.275 U1.16@46.7,35.275 48.575,35.275 48.8,35.5 v1(49.275,35.5) ; U1.38@44.4,47.075 44.4,48.4 45.575,49.575 51.15,49.575 52.35,48.375 v1(52.375,48.375) ; v1(45.7,91.9) 45.625,91.825 44.825,91.825 44.225,92.425 44.225,93.8 47.07,96.645 U2.36@47.07,97.85 U2.35@47.07,98.35 ; 50,110.475 51,109.475 U2.19@51,104.78 51,101.575 v1(50.3,100.875) ; v1(50.225,99.425) 49.225,99.425 48.15,98.35 U2.35@47.07,98.35 ; v1(53.5,91.5) U2.47@53.5,96.42 v1(53.5,98.925) ; v1(55.825,109.075) 54.25,109.075 53,107.825 U2.15@53,104.78 53,102.65 v1(53.025,102.625) 53.225,102.625 55.3,104.7 56.75,104.7 v1(57.925,103.525) ; v1(63.025,96.975) 63.05,97 R104.1@63.05,99.5 ; J1.6@72.15,53.425 74.85,53.425 75.675,52.6 75.675,50.4 ; J1.10@72.65,48.925 75.075,48.925 75.675,49.525 75.675,50.4 ; J1.13@72.65,63.575 81.35,63.575 ; v1(76.875,50.325) 76.8,50.4 75.675,50.4 ; J1.11@82.25,48.975 82.25,49.45 v1(81.125,50.575) 81.125,54.65 ; J1.12@82.25,64.475 81.9,64.125 81.35,63.575 ; v1(85.425,54.65) 81.125,54.65 ; 81.125,54.65 81.125,63.35 81.35,63.575
  Top Layer w0.508: 0.56,16.25 0.8,16.49 0.8,16.575 0.8,22.675 ; P4.19@2.635,22.675 0.8,22.675 ; SW2.2@2.765,69.815 S2.4@2.765,62.64 S2.5@2.765,60.1 S2.6@2.765,57.56 2.765,53.19 0.8,51.225 0.8,22.675 ; SW2.2@3.45,69.6 3.45,77.215 ; D7.2@3.675,88.818 2.232,88.818 0.75,90.3 ; v1(15.045,78.15) 15.035,78.14 10.675,78.14 C33.2@9.75,77.215 3.45,77.215 ; v1(15.8,68.175) 15.825,68.15 15.825,58.55 v1(17.925,56.45) ; v1(19.65,53.6) 19.65,49.5 v1(21.375,47.775) ; v1(20.125,68.1) 25.36,73.335 P3.20@25.89,73.335 ; C17.2@21.525,21.1 23.775,21.1 C8.2@24.1,21.425 ; C8.2@23.975,21.5 v1(26.1,21.5) ; P1.2@24.64,2.25 26.265,0.625 66.825,0.625 67.82,1.62 P1.19@67.82,2.25 ; v1(30.875,92.925) 32.575,92.925 v1(32.925,93.275) ; v1(32.915,97.665) U4.2@32.915,96.117 30.849,94.05 21.725,94.05 19.863,95.913 ; U4.2@32.949,96.15 R105.2@35.625,96.15 36.55,96.15 38.225,97.825 ; v1(33.75,104.55) 33.775,104.525 33.775,102.625 ; v1(40.675,100) 40.525,100.15 39.75,100.15 37.275,102.625 33.775,102.625 ; v1(48.35,25.55) 48.775,25.55 49.675,24.65 C21.2@49.675,23.9 ; v1(52.375,48.375) 53.55,48.375 v1(56.525,51.35) ; v1(55.45,71.9) 55.45,74.5 v1(55.65,74.7) ; v1(55.475,30.875) 56.85,29.5 63.075,29.5 64.425,30.85 64.425,44.875 63.075,46.225 57.625,46.225 56.15,44.75 v1(56.125,44.75) ; v1(62.325,47.625) 64.475,49.775 v1(64.725,49.775) 64.725,56.7 v1(64.775,56.75) ; v1(62.5,59.725) 62.5,63.475 62.85,63.825 v1(66.925,63.825) J1.13@72.4,63.825 ; v1(69.575,69.95) 69.55,69.975 v1(69.55,73.175) 69.55,76.975 76.925,84.35 ; v1(70.575,46.7) 71.65,46.7 72.65,47.7 J1.10@72.65,48.925 ; P8.13@75.5,95.48 75.5,85.775 76.925,84.35 ; v1(77.7,10.3) 77.75,10.3 P2.20@84.84,17.39 P2.19@82.3,17.39 ; v1(81.125,50.575) 81.43,50.575 J1.10@82.65,51.795 ; J1.12@81.9,64.125 82.65,63.375 J1.10@82.65,59.775 ; v1(86.65,78.675) 86.325,79 SW1.2@83.325,79 82.275,79 76.925,84.35 ; 0.75,90.3 0.75,79.7 3.235,77.215 3.45,77.215 ; 0.75,90.3 0.75,98 1.59,98.84 P7.2@2.8,98.84 2.8,107.16 C34.2@3.515,107.875 8.215,112.575 11.3,112.575 18.575,105.3 ; 18.575,105.3 v1(18.575,101.6) 18.025,101.05 U3.1@18.025,97.75 19.863,95.913 ; 18.575,105.3 22.275,101.6 22.275,101.575 ; 19.863,95.913 19.863,99.163 22.275,101.575 ; 22.275,101.575 23.325,102.625 33.775,102.625
  Bottom Layer w0.256: P6.1@2,6.3 6.675,6.3 6.95,6.575 R92.2@6.95,7.15 11.2,7.15 12.49,5.86 12.49,5.59 ; P4.19@2.25,22.29 P4.19@2.75,22.79 ; 8.975,61.375 9.075,61.475 v1(20.7,61.475) v1(24.125,61.475) ; v1(11.575,12) 11.575,11.875 12.612,10.837 12.612,5.713 ; P5.2@12.49,2.25 12.49,5.59 ; R90.2@17.65,12.725 16.4,12.725 15.825,12.15 15.825,9.1 16.7,8.225 v1(16.7,6.6) 13.5,6.6 12.612,5.713 ; R90.2@17.675,12.75 R93.2@23.275,12.75 23.275,17.325 v1(23.25,17.35) ; v1(21.375,47.775) 19.875,46.275 19.875,40.125 v1(21.825,40.125) ; v1(23.225,28.35) 26.125,25.45 28.025,25.45 ; P3.20@25.89,73.335 25.89,71.885 27.5,70.275 32.95,70.275 v1(39.425,63.8) ; v1(26.1,21.5) 26.775,22.175 26.775,22.9 28.025,24.15 28.025,25.45 ; v1(28.375,41.625) 28.15,41.85 28.15,43 28.4,42.75 28.4,41.4 30.775,41.4 30.9,41.275 ; v1(32.9,30) 32.9,28.925 32.875,28.9 31.575,27.6 C32.2@31.575,24.65 ; v1(33.775,41.2) 33.775,43.35 C6.2@33.65,43.475 38.025,43.475 C18.2@38.125,43.375 ; 34.8,30.115 34.8,24.9 39.8,19.9 46.625,19.9 48.325,18.2 48.325,17.95 ; 34.9,24.675 34.875,24.65 C32.2@31.575,24.65 ; v1(37.875,41.8) C18.2@37.875,43.125 ; C20.2@37.9,30.446 v1(37.9,31.6) ; v1(42.85,41.275) C9.2@42.85,42.825 ; v1(43.65,113.575) 43.65,109.125 43.975,108.8 C23.2@46.525,108.8 48.45,110.725 51.925,110.725 52.375,110.275 52.375,110 53.175,109.2 C26.2@53.175,107.375 ; v1(45.7,91.9) C24.2@47.2,91.9 ; v1(46.65,16.45) 48.15,17.95 48.325,17.95 ; C28.2@47.95,100.125 49.525,100.125 ; R89.2@49.6,18.225 49.325,17.95 48.325,17.95 ; v1@50.225,100.8 50.225,100.125 ; v1(50.3,100.875) C29.2@50.3,102.425 ; C29.2@50.45,102.575 v1@52.975,102.575 ; 52.1,86.25 52.725,86.25 52.975,86 54.146,86 54.78,86.634 54.894,86.519 ; 52.325,91.85 52.675,91.5 v1(53.5,91.5) C27.2@58.8,91.5 ; v1(52.375,48.375) 52.375,45.65 C5.2@52.4,45.625 ; C26.2@53.025,107.225 v1(53.025,102.625) 59.175,102.625 63.025,98.775 v1(63.025,96.975) 64.7,95.3 64.7,91.45 ; v1(53.5,98.925) 52.3,100.125 50.225,100.125 ; C27.2@58.85,91.45 64.7,91.45 ; P8.8@69.66,107.665 72.195,107.665 P8.14@75.5,110.97 P8.13@75.5,95.48 71.47,91.45 64.7,91.45 ; v1(76.875,50.325) 77.125,50.575 v1(81.125,50.575) ; v1(85.425,54.65) 86.65,54.65 ; 12.49,5.59 12.612,5.713 ; 28.025,25.45 30.775,25.45 C32.2@31.575,24.65 ; 49.525,100.125 v1(50.225,99.425) 50.225,100.125 ; 49.525,100.125 50.225,100.125
  Bottom Layer w0.5: v1(2.25,17.575) P4.19@2.25,22.29 ; P4.19@2.75,22.79 P4.20@5.29,22.79
  Bottom Layer w0.508: P7.2@2.8,98.84 11.715,89.925 23.625,89.925 ; C33.2@9.75,77.215 9.75,74.125 15.775,68.1 v1(20.125,68.1) ; v1(15.045,78.15) 23.615,78.15 P3.19@25.89,75.875 P3.20@25.89,73.335 ; v1(17.925,56.45) 17.925,55.175 20.65,52.45 C10.2@22.525,52.45 ; v1(21.375,47.775) 21.55,47.6 C31.2@23.525,47.6 23.525,46.175 26.7,43 28.15,43 29.4,43 29.6,43.2 ; v1(22.95,102.325) 22.95,102.275 22.275,101.6 v1(18.575,101.6) 18.575,95.45 21.1,92.925 v1(30.875,92.925) ; v1(25.35,102.6) 25.375,102.625 37.3,102.625 39.925,100 v1(40.675,100) 40.675,97.95 36.4,93.675 33.575,93.675 33.3,93.4 33.05,93.4 v1(32.925,93.275) ; 28.325,92.625 25.625,89.925 23.625,89.925 ; C3.1@29.825,49.775 29.825,43.425 29.6,43.2 ; C35.2@31.3,98.175 31.5,97.975 32.606,97.975 v1(32.915,97.665) ; 32.875,28.9 C4.1@30.425,28.9 30.9,29.375 C7.2@30.9,39.65 30.9,41.275 30.9,41.675 29.6,42.975 29.6,43.2 ; 32.9,28.925 34.09,30.115 34.8,30.115 C20.2@37.569,30.115 C19.2@41.665,30.115 ; v1(33.75,104.55) 33.75,106.725 37.6,110.575 37.6,112.1 39.1,113.6 v1(39.4,113.6) ; C19.2@41.75,30.2 44.4,30.2 C14.2@44.825,30.625 ; v1(42.85,41.275) 44.15,41.275 46.6,38.825 C13.2@46.6,36.05 ; C9.2@42.85,42.825 C9.2@43.175,43.15 43.9,43.15 47.35,46.6 v1(47.35,49.525) ; C24.2@47.6,92.3 49.025,90.875 C25.2@50.2,90.875 51.275,90.875 52.325,91.925 ; R89.2@49.6,18.225 R89.2@49.975,17.85 R86.1@61.975,17.85 64.55,17.85 67.82,14.58 ; 52.325,91.85 52.325,91.925 ; C30.2@52.65,93.925 52.65,92.25 52.325,91.925 ; v1(55.65,74.7) 56.525,74.7 58.05,73.175 v1(69.55,73.175) ; v1(56.525,51.35) 56.525,60.4 53.65,63.275 53.65,67.35 55.45,69.15 v1(55.45,71.9) 55.375,71.9 48.535,78.74 34.81,78.74 23.625,89.925 ; v1(62.325,47.625) 62.05,47.35 62.05,45.975 ; v1(62.5,59.725) 64.775,57.45 v1(64.775,56.75) ; v1(64.425,35.35) 64.325,35.25 64.325,30.8 63.1,29.575 56.775,29.575 v1(55.475,30.875) ; v1(64.45,39.3) 64.45,44.6 63.075,45.975 62.05,45.975 ; v1(64.725,49.775) 67.5,49.775 v1(70.575,46.7) ; v1(66.925,63.825) 66.925,67.25 69.6,69.925 C22.2@77.4,69.925 ; v1(69.525,71.575) 69.575,71.525 v1(69.575,69.95) ; v1(77.7,10.3) 72.1,10.3 67.82,14.58 ; v1(86.65,78.675) 86.7,78.625 86.7,19.075 85.015,17.39 P2.20@84.84,17.39 84.84,8.915 76.625,0.7 69.37,0.7 P1.19@67.82,2.25 67.82,14.58 ; C14.2@44.825,30.625 44.825,33.3 46.6,35.075 C13.2@46.6,36.05 ; C14.2@44.825,30.625 44.825,27.75 46.55,26.025 47.875,26.025 v1(48.35,25.55) 50.15,25.55 v1(55.475,30.875) ; C13.2@46.6,36.05 48.05,36.05 ; 48.05,36.05 51.525,39.525 C15.2@51.525,42.35 51.525,44.75 C5.2@52.4,45.625 52.4,44.425 53.725,43.1 C2.1@55.475,43.1 55.475,43.925 57.525,45.975 62.05,45.975 ; 48.05,36.05 50.5,36.05 54.075,32.475 C1.2@55.475,32.475 v1(55.475,30.875)
  other v1: 53.25,35.425 55.25,40.65 28.175,42.55 38.825,53.65 43.85,53.775 51.675,54.45 46.825,58.45 38.9,58.7 14.1,61.5 49.65,62.125 20.2,75.775 33.5,79.4 19.575,84.825 26.825,84.825 33.25,84.925 56,91.3 56.2,95.85 45.525,104.675 36.875,108.575 67.975,112.825
  other v2: 67.058,1.069 72.058,1.069 77.058,1.069 82.058,1.069 4.558,6.069 19.558,6.069 64.558,6.069 74.558,6.069 79.558,6.069 84.558,6.069 62.058,11.069 77.058,11.069 82.058,11.069 19.558,16.069 24.558,16.069 64.558,16.069 32.058,31.069 29.558,36.069 34.558,36.069 39.558,36.069 37.058,41.069 69.558,46.069 84.558,46.069 2.058,51.069 17.058,51.069 52.058,51.069 4.558,56.069 14.558,56.069 19.558,56.069 84.558,56.069 47.058,61.069 67.058,61.069 72.058,61.069 77.058,61.069 82.058,61.069 4.558,66.069 9.558,66.069 19.558,66.069 64.558,66.069 69.558,66.069 74.558,66.069 84.558,66.069 12.058,71.069 22.058,71.069 62.058,71.069 67.058,71.069 72.058,71.069 4.558,76.069 64.558,76.069 69.558,76.069 79.558,76.069 2.058,81.069 7.058,81.069 62.058,81.069 67.058,81.069 77.058,81.069 82.058,81.069 69.558,86.069 74.558,86.069 2.058,91.069 7.058,91.069 27.058,91.069 32.058,91.069 62.058,91.069 67.058,91.069 72.058,91.069 77.058,91.069 82.058,91.069 69.558,96.069 2.058,101.069 7.058,101.069 17.058,101.069 22.058,101.069 82.058,101.069 4.558,106.069 79.558,106.069 2.058,111.069 7.058,111.069 12.058,111.069 17.058,111.069 22.058,111.069
"ISP RXD": P5.1 U1.101 | length 37.1
  Top Layer w0.256: P5.1@9.95,2.25 9.95,9.3 17.05,16.4 17.05,23.5 19.625,26.075 19.625,28.013 22.887,31.275 U1.101@25.6,31.275
"ISP TXD": P5.3 U1.102 | length 34.4
  Top Layer w0.256: P5.3@15.03,2.25 15.03,13.63 17.7,16.3 17.7,23.4 20.15,25.85 20.15,27.925 23,30.775 U1.102@25.6,30.775
ISP-BOOT: R88.1 R91.2 U1.138 | length 8.4
  Top Layer w0.256: R91.2@41.9,19.85 U1.138@41.9,25.975 ; R91.2@42.125,19.675 R88.1@44.45,19.675
LED0: D1.1 U1.140 | length 19.6
  Top Layer w0.256: U1.140@42.9,25.975 42.9,24.325 46.65,20.575 55.818,20.575 D1.1@58.3,18.093
LED1: D2.1 U1.139 | length 15.7
  Top Layer w0.256: U1.139@42.4,25.975 42.4,24.125 46.525,20 51.893,20 D2.1@53.8,18.093
LED2: D3.1 U1.112 | length 17.8
  Top Layer w0.256: D3.1@20.675,13.293 23.568,13.293 28.9,18.625 U1.112@28.9,25.975
LED3: D4.1 U1.113 | length 14
  Top Layer w0.256: D4.1@26.325,13.293 26.325,14.025 29.4,17.1 U1.113@29.4,25.975
LED_ACT: R106.1 R108.2 U2.26 | length 93.5
  Top Layer w0.256: v1(42.6,103.75) 42.6,103.275 43.031,102.844 47.064,102.844 U2.26@47.07,102.85 ; v1(79.15,115.225) 85.075,115.225 86.225,114.075 86.225,90.25 84.675,88.7 82.1,88.7 81.675,88.275 81.675,87.4 81.35,87.075 R108.2@80.45,87.075
  Bottom Layer w0.256: v1(42.6,103.75) 42.6,104.275 40.35,106.525 40.35,112.05 43.525,115.225 v1(79.15,115.225)
LED_LINK: R107.1 R109.2 U2.28 | length 70.2
  Top Layer w0.256: v1(39.4,102.325) 39.875,101.85 U2.28@47.07,101.85 ; v1(78.85,112.825) R109.2@82.05,112.825
  Bottom Layer w0.256: v1(39.4,102.325) 39.4,112.375 43.1,116.075 79.825,116.075 81.725,114.175 81.725,112.875 R107.1@81.775,112.825 ; v1(78.85,112.825) R107.1@81.775,112.825 ; R107.1@81.9,112.7 R107.1@81.775,112.825
LED_SPEED: R94.2 U2.27 | length 24.5
  Top Layer w0.256: R94.2@28.675,109.625 28.675,105.725 28.925,105.475 v1(40.2,105.475) ; v1@41.35,102.35 U2.27@47.07,102.35
  Bottom Layer w0.256: v1(40.2,105.475) 41.125,104.55 v1(41.125,102.575)
MII_MODE: R95.1 U2.39 | length 10.5
  Top Layer w0.256: R95.1@46.975,86.95 46.975,90.35 49.5,92.875 U2.39@49.5,96.42
NetC1_1: C1.1 R44.2 U1.23 Y1.2 | length 20.7
  Top Layer w0.256: U1.23@46.7,38.775 54.025,38.775 55.775,37.025 R44.2@57,37.025 57,34.625 v1(56.95,34.575) 57.875,33.65 60.995,33.65 Y1.2@61.475,33.17
  Bottom Layer w0.256: v1(56.95,34.575) 56.95,32.5 C1.1@56.975,32.475
NetC2_2: C2.2 R44.1 U1.24 Y1.1 | length 20.7
  Top Layer w0.256: U1.24@46.7,39.275 55.175,39.275 v1(56.975,41.075) ; R44.1@57,38.525 57,41.05 v1(56.975,41.075) ; Y1.1@61.475,42.48 58.38,42.48 v1(56.975,41.075)
  Bottom Layer w0.256: v1(56.975,41.075) C2.2@56.975,43.1
NetC3_2: C3.2 U1.71 | length 7.7
  Top Layer w0.256: U1.71@27.9,47.075 27.9,45.45 28.4,44.95 v1(28.75,44.95)
  Bottom Layer w0.256: C3.2@28.325,49.775 28.75,49.35 v1(28.75,44.95)
NetC4_2: C4.2 U1.106 | length 5.2
  Top Layer w0.256: U1.106@25.6,28.775 27.325,28.775 v1(28.925,30.375)
  Bottom Layer w0.256: C4.2@28.9,29.125 28.925,29.15 v1(28.925,30.375)